# Altium PCB fhd-hdr.PcbDoc
Units mil, origin at the board's own origin, x right, y up, seen from the top; angles counter-clockwise.
Board outline 1400 x 650 mil, 6 copper layers (Top, 2-GND, 3-SIG, 4-SIG, 5-GND, Bottom), stack 46.142 mil thick; 75 components, 43 nets, 307 pads, 160 vias.
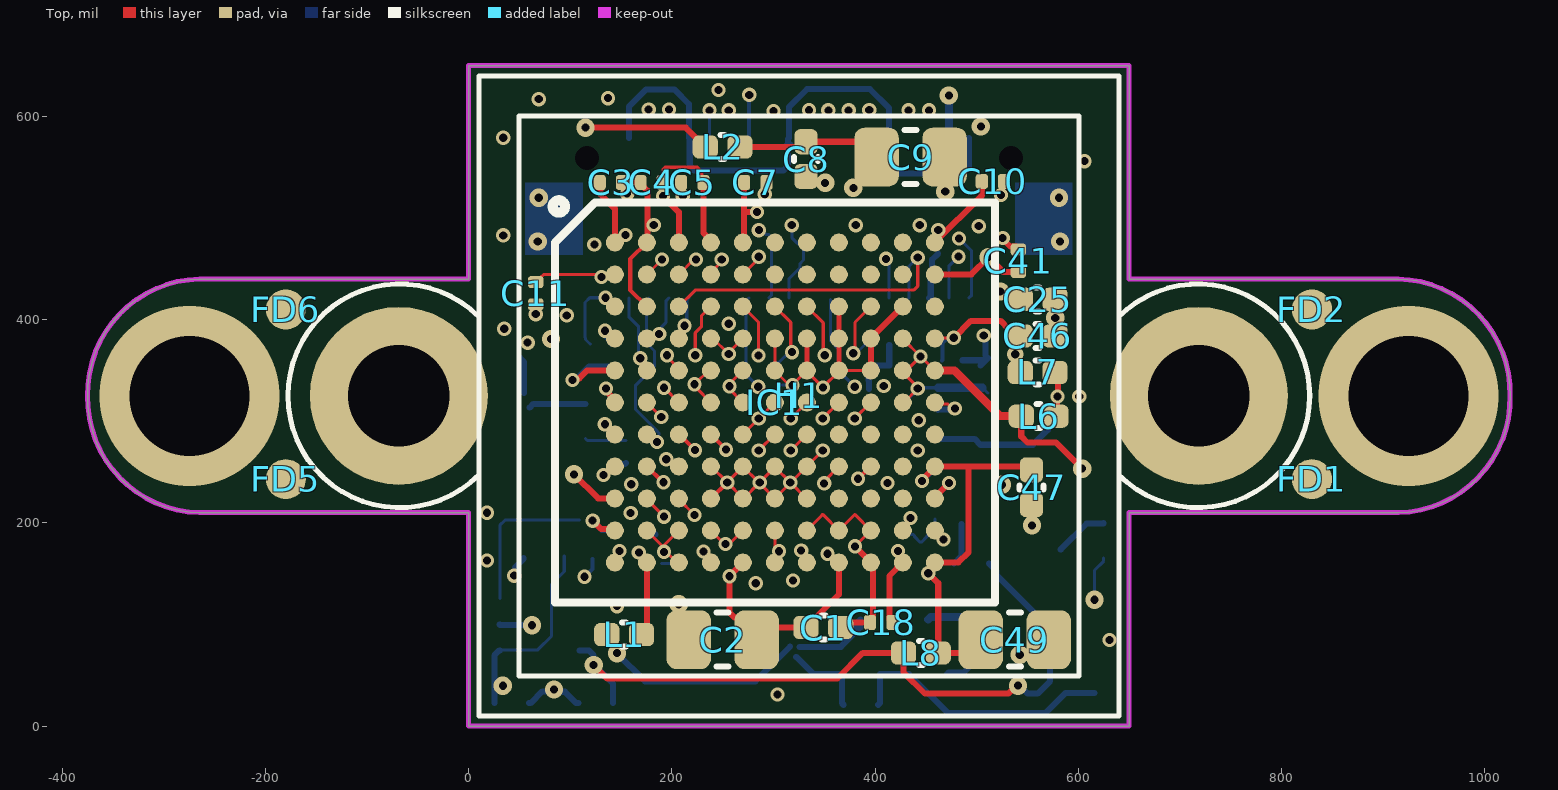
[diagram p0: Top view]
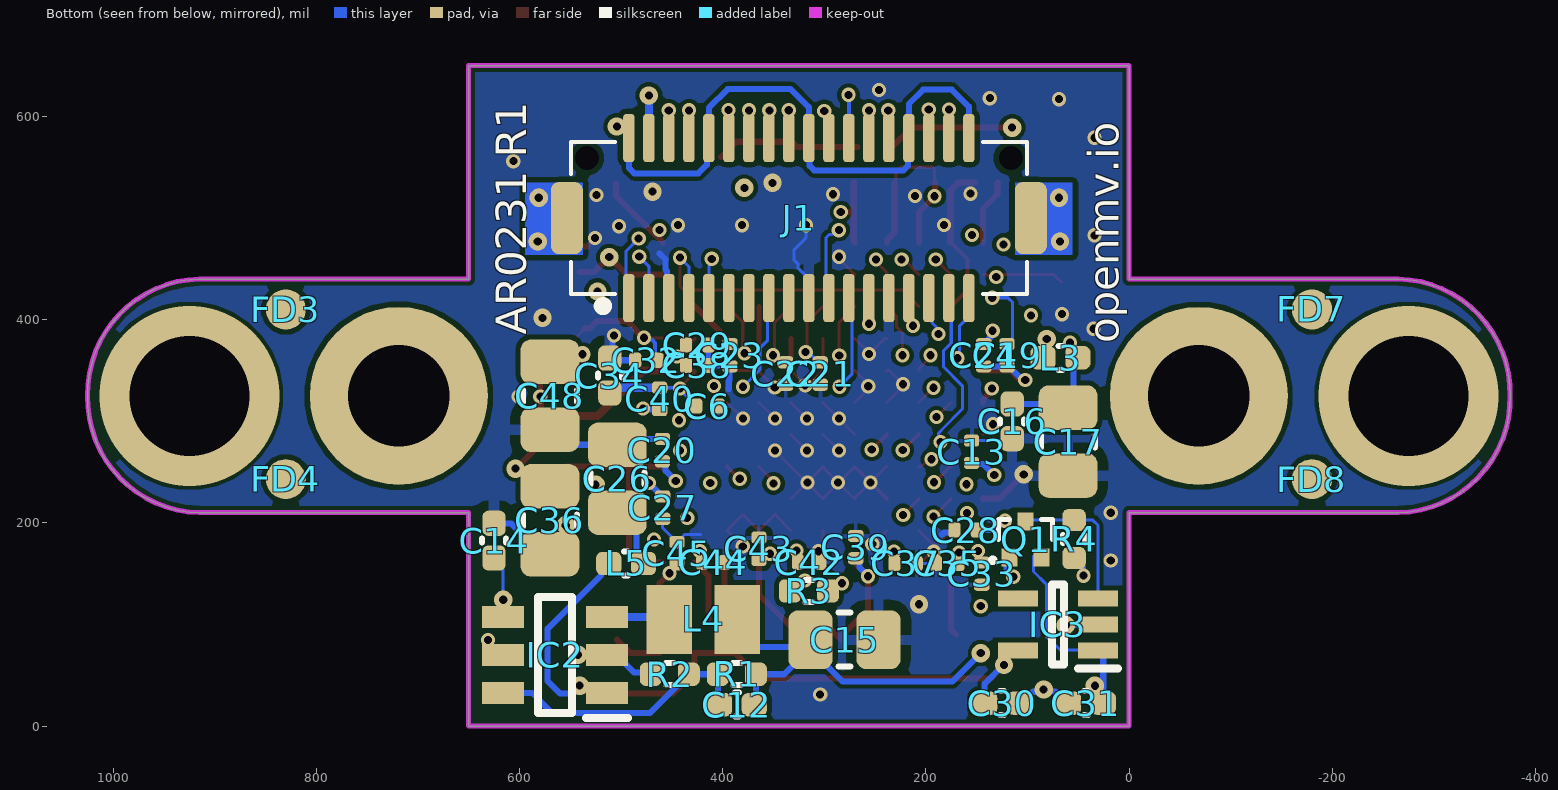
[diagram p1: Bottom view, seen from below]
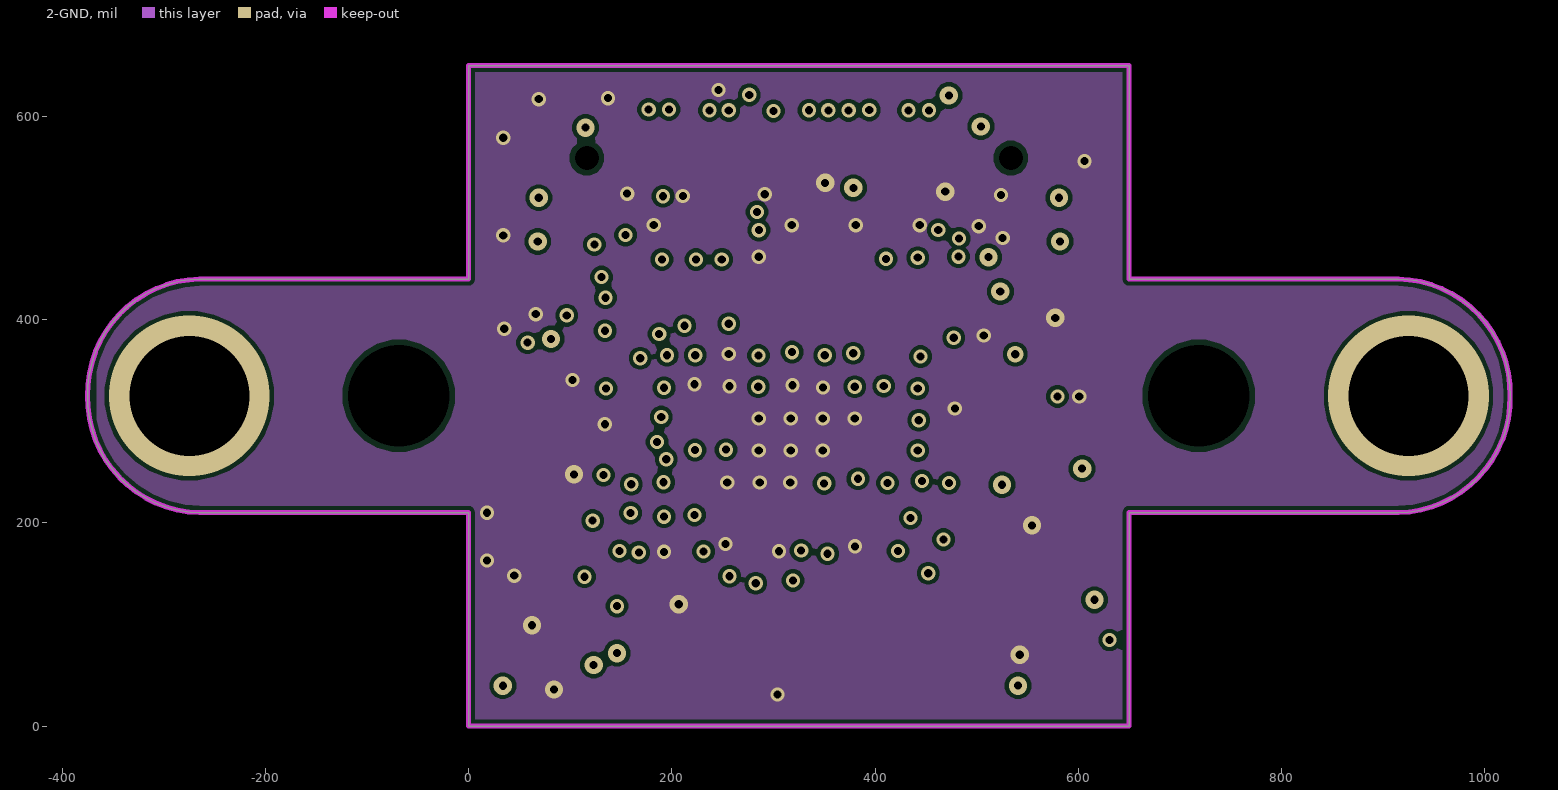
[diagram p2: 2-GND]
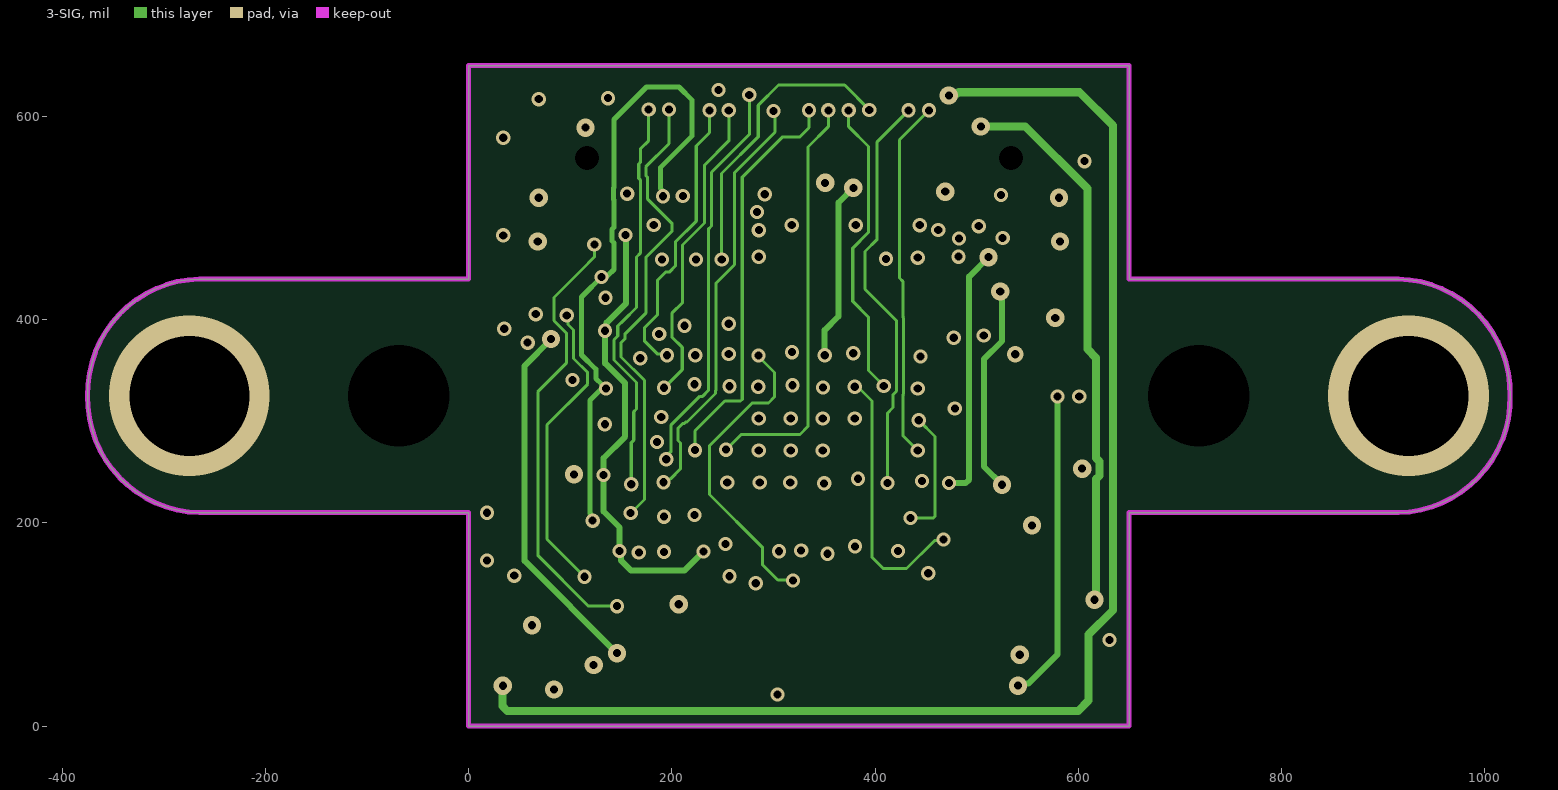
[diagram p3: 3-SIG]
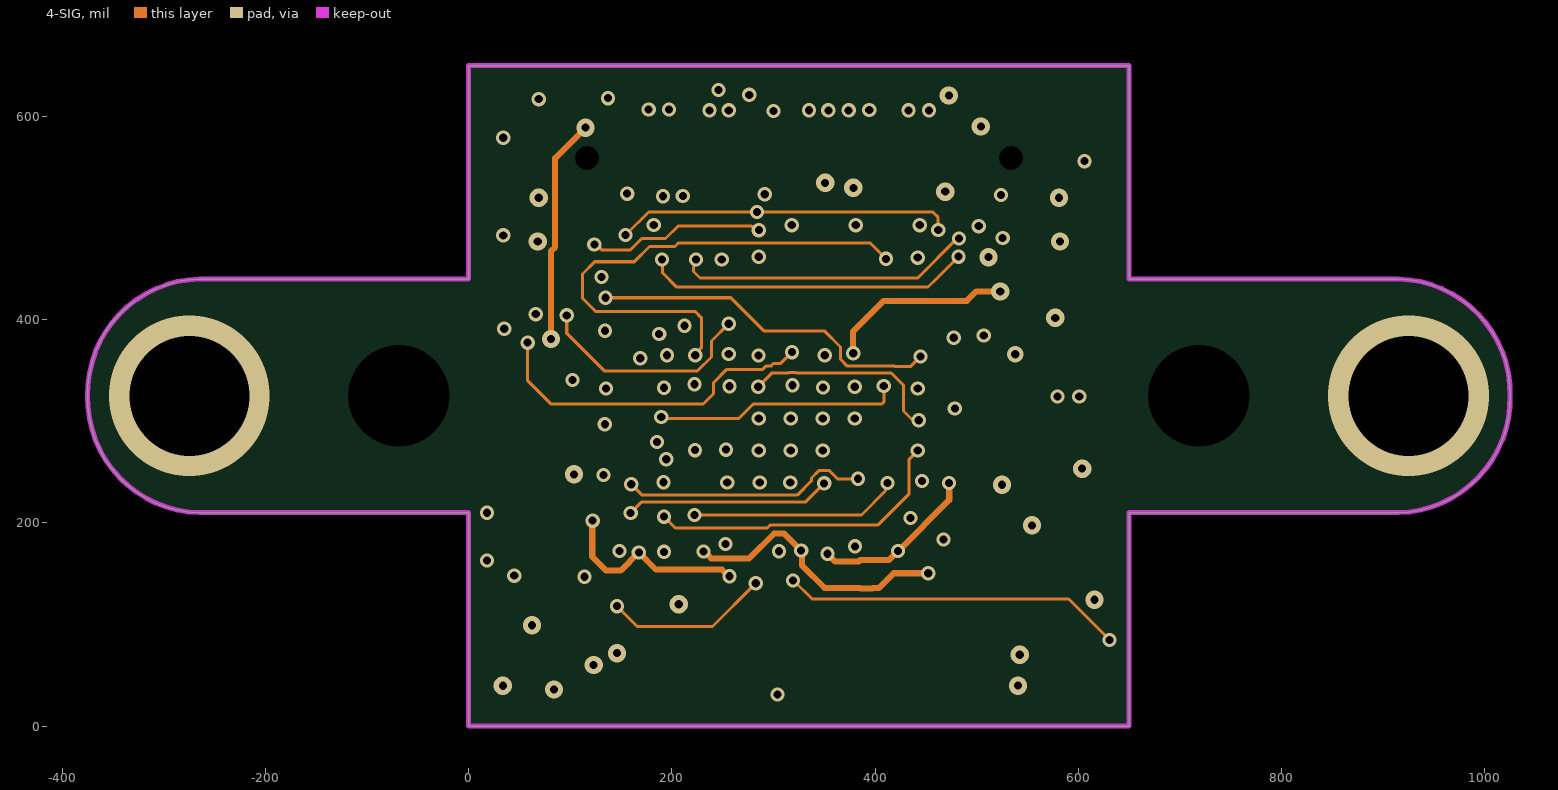
[diagram p4: 4-SIG]
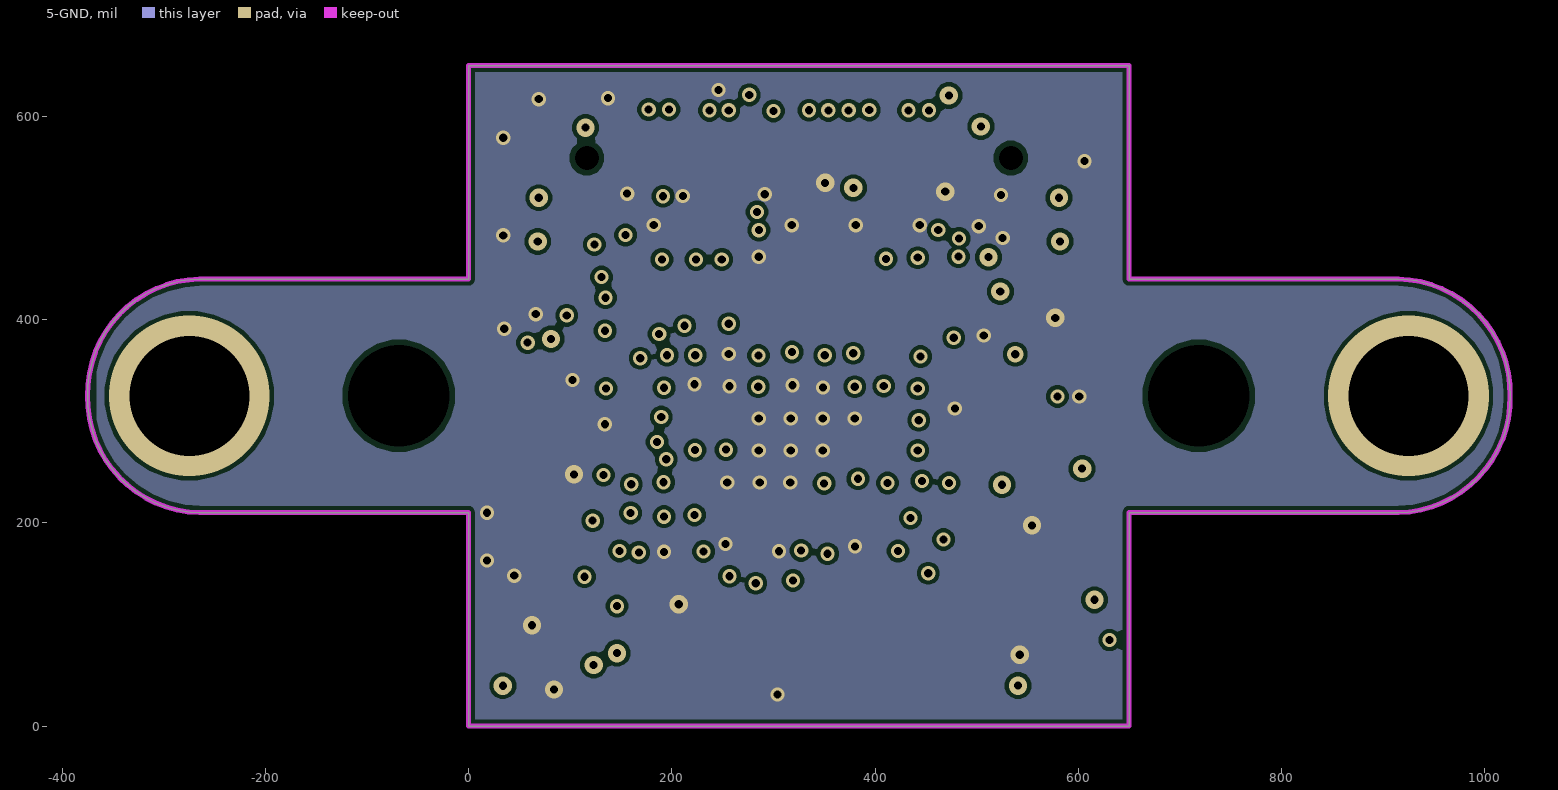
[diagram p5: 5-GND]
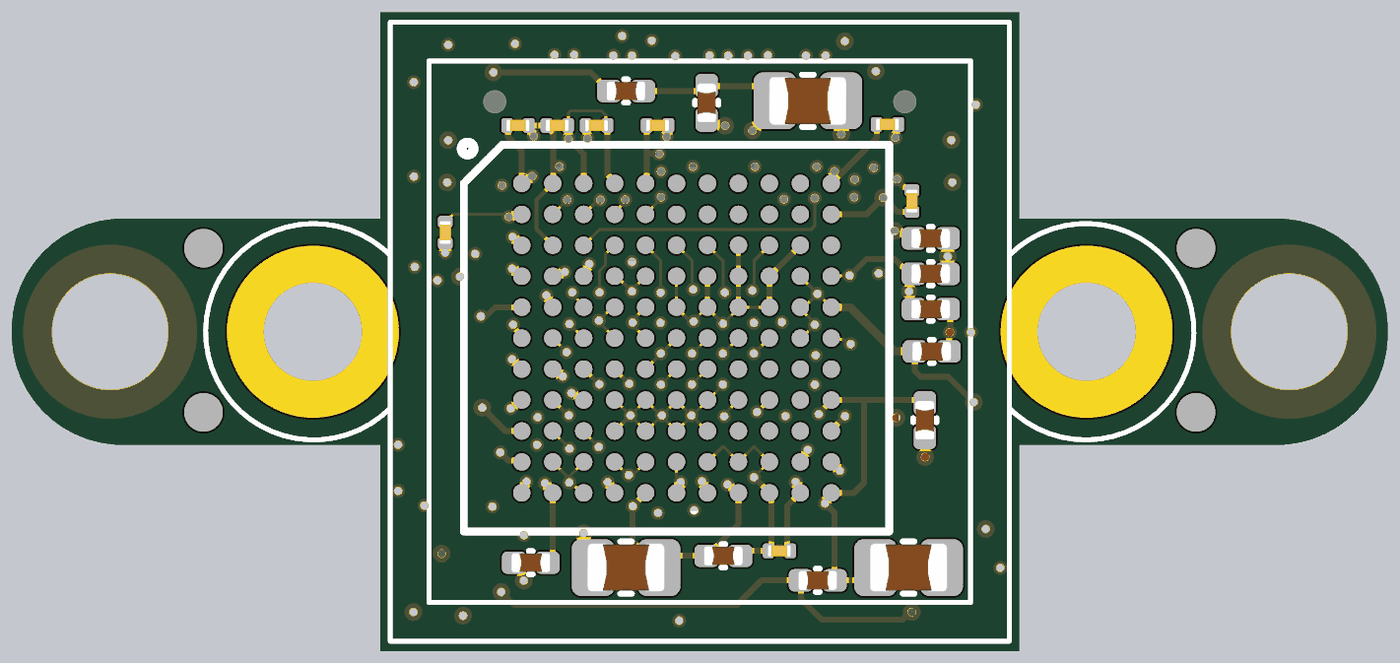
[diagram p6: 3D render of the assembled board from above, using the file's embedded part models]
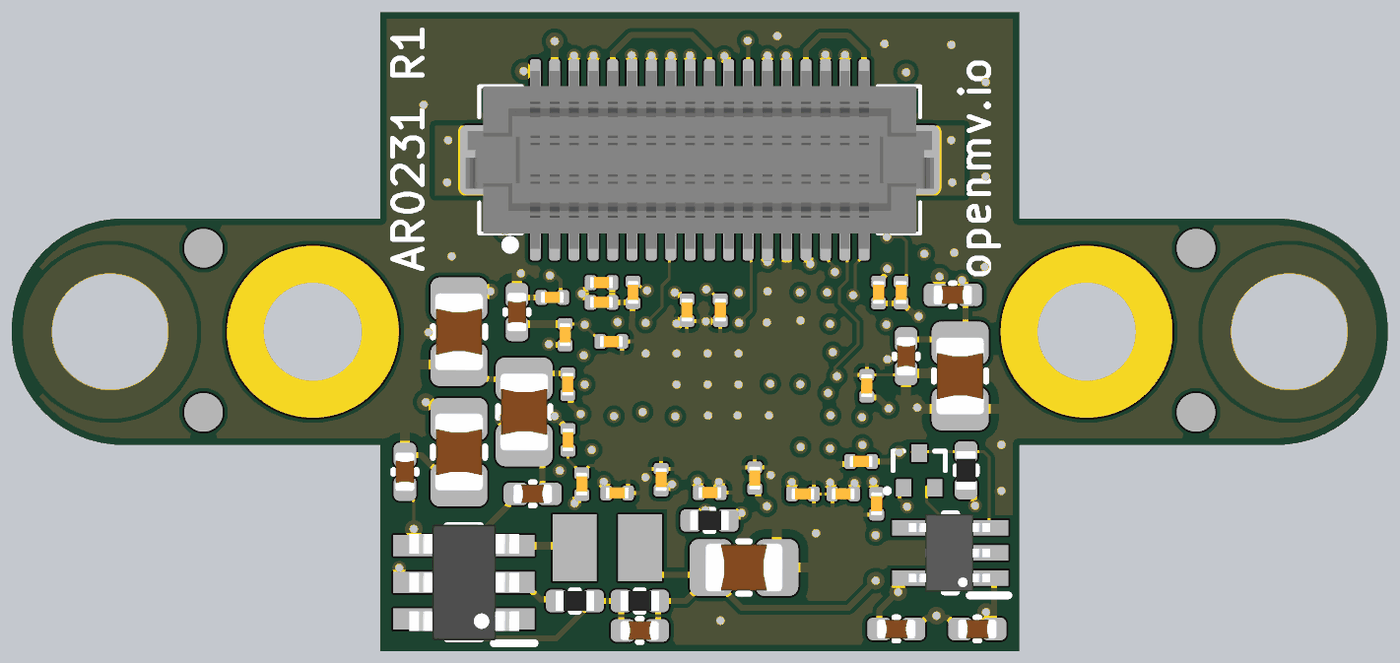
[diagram p7: 3D render of the assembled board from below, using the file's embedded part models]

## Layer stack, top to bottom
Top Solder: solder mask 0.4, Solder Resist, Dk 3.5
Top: signal copper 1.378
Dielectric 2: prepreg 5, PP-006, Dk 4.1
2-GND: signal copper 1.378
Dielectric 3: prepreg 10, PP-006, Dk 4.1
3-SIG: signal copper 1.378
Dielectric 1: dielectric 7.874, FR-4, Dk 4.8
4-SIG: signal copper 1.378
Dielectric 4: prepreg 10, PP-006, Dk 4.1
5-GND: signal copper 1.378
Dielectric 9: prepreg 5, PP-006, Dk 4.1
Bottom: signal copper 1.378
Bottom Solder: solder mask 0.4, Solder Resist, Dk 3.5

## Board outline
914.97,210 649.97,210 649.97,0 -0.03,0 -0.03,210 -265.03,210 cw(c-262.53,322.5) -375.03,325 cw(c-262.53,327.5) -265.03,440 -0.03,440 -0.03,650 649.97,650 649.97,440 914.97,440 cw(c912.47,327.5) 1024.97,325 cw(c912.47,322.5)

## Design rules (kind name [scope] priority, off if disabled: settings)
BoardOutlineClearance mdCopperDimension [All] p1: gap=10 ignorepadtopadclearanceinfootprint=FALSE except(0: Arc-SplitContinuation Track-SplitContinuation SMDPad-SplitContinuation THPad-SplitContinuation Via-SplitContinuation Fill-SplitContinuation Poly-SplitContinuation Region-SplitContinuation Text-SplitContinuation; 3: Poly-OutlineEdge Poly-CavityEdge Poly-CutoutEdge Poly-SplitBarrior)
Clearance [All] p1: gap=4 ignorepadtopadclearanceinfootprint=FALSE except(5: SMDPad-Fill SMDPad-Poly SMDPad-Region THPad-Fill THPad-Poly THPad-Region Fill-Fill Fill-Poly Fill-Region Poly-Poly Poly-Region Region-Region)
ComponentClearance ComponentClearance_1 [InComponent('H1')] p1: gap=0 collisioncheckmode=3 verticalgap=0 showdistances=FALSE
ComponentClearance [not InComponent('H1')] p2: gap=6 collisioncheckmode=3 verticalgap=0 showdistances=FALSE
HoleSize HoleSize_For_NetClass_signal [InNetClass('signal')] p1: absolutevalues=TRUE maxlimit=4 minlimit=4 maxpercent=80.000 minpercent=20.000
HoleSize HoleSize_For_NetClass_pwr [InNetClass('pwr')] p2: absolutevalues=TRUE maxlimit=4 minlimit=4 maxpercent=80.000 minpercent=20.000
HoleSize HoleSize_For_NetClass_gnd [InNetClass('gnd')] p3: absolutevalues=TRUE maxlimit=4 minlimit=4 maxpercent=80.000 minpercent=20.000
HoleSize [All] p4: absolutevalues=TRUE maxlimit=100000 minlimit=4 maxpercent=80.000 minpercent=20.000
HoleToHoleClearance mdDrill [All] p1: gap=3 allowstackedmicrovias=TRUE
MinimumSolderMaskSliver [All] p1 off: minsoldermaskwidth=10
PasteMaskExpansion Expansion_SMDPaste_OFF [InPadClass('SMDPaste_OFF')] p1: expansion=0
PasteMaskExpansion mlMinCreamFrame [All] p2: expansion=0
PolygonConnect 0201 [HasFootprint('C0201')] p1: thpad.connectstyle=Relief thpad.reliefconductorwidth=10 thpad.reliefentries=4 thpad.polygonreliefangle="90 Angle" thpad.airgapwidth=10 smdpad.connectstyle=Relief smdpad.reliefconductorwidth=4 smdpad.reliefentries=4 smdpad.polygonreliefangle="90 Angle" smdpad.airgapwidth=6 via.connectstyle=Direct via.reliefconductorwidth=10 via.reliefentries=4 via.polygonreliefangle="90 Angle" via.airgapwidth=10
PolygonConnect PolygonConnect_1 [All] p2: thpad.connectstyle=Relief thpad.reliefconductorwidth=10 thpad.reliefentries=4 thpad.polygonreliefangle="90 Angle" thpad.airgapwidth=10 smdpad.connectstyle=Relief smdpad.reliefconductorwidth=10 smdpad.reliefentries=4 smdpad.polygonreliefangle="90 Angle" smdpad.airgapwidth=10 via.connectstyle=Direct via.reliefconductorwidth=10 via.reliefentries=4 via.polygonreliefangle="90 Angle" via.airgapwidth=10
RoutingVias [All] p1: holewidth=8 width=14 viastyle="Through Hole" minholewidth=8 minwidth=14 maxholewidth=100 maxwidth=100
SolderMaskExpansion mlMinStopFrame [All] p1: expansion=2 istentingtop=FALSE
Width Width_For_NetClass_signal [InNetClass('signal')] p1: maxlimit=10 minlimit=3 preferedwidth=3
Width Width_For_NetClass_pwr [InNetClass('pwr')] p2: maxlimit=10 minlimit=3 preferedwidth=3
Width Width_For_NetClass_gnd [InNetClass('gnd')] p3: maxlimit=10 minlimit=3 preferedwidth=3
Width [All] p4: maxlimit=10 minlimit=3 preferedwidth=3
25 further rules are at their usual default settings.

## Classes and differential pairs
pad class SMDPaste_OFF: FD1-1 FD2-1 FD3-1 FD4-1 FD5-1 FD6-1 FD7-1 FD8-1

## Components (designator, comment, footprint, x,y, rotation, side; value= is the part's Value field where it differs from the comment)
C1 "4.7uF" 0402 349,97 r180 top
C2 "22uF" 0805 249.97,85 r0 top
C3 "0.22uF" C0201 140,535 r0 top
C4 "0.22uF" C0201 179.97,535 r180 top
C5 "0.22uF" C0201 219.97,535 r180 top
C6 "0.22uF" C0201 414.97,315 r0 bottom
C7 "0.22uF" C0201 282,535 r0 top
C8 "4.7uF" 0402 332,558 r90 top
C9 "22uF" 0805 434.97,560 r180 top
C10 "0.22uF" C0201 516,536 r0 top
C11 "0.22uF" C0201 66,426 r270 top
C12 "6.8pF" 0402 386,21 r0 bottom
C13 "0.22uF" C0201 154.97,270 r270 bottom
C14 "4.7uF" 0402 624.97,182.5 r270 bottom
C15 "22uF" 0805 280,85 r0 bottom
C16 "4.7uF" 0402 114.97,300 r90 bottom
C17 "22uF" 0805 59.97,280 r90 bottom
C18 "0.22uF" C0201 406,102 r180 top
C19 "0.22uF" C0201 120,365 r270 bottom
C20 "0.22uF" C0201 459.3,271.61 r270 bottom
C21 "0.22uF" C0201 304,347 r270 bottom
C22 "0.22uF" C0201 338,347 r270 bottom
C23 "0.22uF" C0201 392.86,365.02 r270 bottom
C24 "0.22uF" C0201 143,365 r270 bottom
C25 "4.7uF" 0402 560,420 r180 top
C26 "22uF" 0805 503.64,243.41 r270 bottom
C27 "0.22uF" C0201 459,215 r90 bottom
C28 "0.22uF" C0201 160.79,192.96 r180 bottom
C29 "0.22uF" C0201 424.97,375 r180 bottom
C30 "4.7uF" 0402 124.97,22.5 r0 bottom
C31 "4.7uF" 0402 42.47,22.5 r180 bottom
C32 "0.22uF" C0201 475,360 r0 bottom
C33 "0.22uF" C0201 144.97,150 r90 bottom
C34 "4.7uF" 0402 511,345 r270 bottom
C35 "0.22uF" C0201 179,160 r180 bottom
C36 "22uF" 0805 569.97,202.5 r90 bottom
C37 "0.22uF" C0201 219.97,160 r0 bottom
C38 "0.22uF" C0201 424.97,355 r180 bottom
C39 "0.22uF" C0201 268.98,176.09 r270 bottom
C40 "0.22uF" C0201 462,322 r270 bottom
C41 "0.22uF" C0201 541,458 r90 top
C42 "0.22uF" C0201 314.79,161.33 r0 bottom
C43 "0.22uF" C0201 364.27,174.52 r270 bottom
C44 "0.22uF" C0201 409,161 r0 bottom
C45 "0.22uF" C0201 444.97,170 r270 bottom
C46 "4.7uF" 0402 560,384 r180 top
C47 "4.7uF" 0402 554,235 r90 top
C48 "22uF" 0805 569.97,325 r90 bottom
C49 "22uF" 0805 537.47,85 r180 top
FD1 "FIDUCIAL1X2" FIDUCIAL-1X2 829.97,243 r0 top
FD2 "FIDUCIAL1X2" FIDUCIAL-1X2 829.97,410 r0 top
FD3 "FIDUCIAL1X2" FIDUCIAL-1X2 829.97,410 r180 bottom
FD4 "FIDUCIAL1X2" FIDUCIAL-1X2 829.97,243 r180 bottom
FD5 "FIDUCIAL1X2" FIDUCIAL-1X2 -180.03,243 r0 top
FD6 "FIDUCIAL1X2" FIDUCIAL-1X2 -180.03,410 r0 top
FD7 "FIDUCIAL1X2" FIDUCIAL-1X2 -180.03,410 r180 bottom
FD8 "FIDUCIAL1X2" FIDUCIAL-1X2 -180.03,243 r180 bottom
H1 "LENSMOUNT20MM" LENSMOUNT-20MM 324.97,325 r0 top locked
IC1 "AR0231AT7C00XUEA0-DRBR-E" BGA121C80P11X11_1100X1000X155 301.35,318.5 r0 top locked
IC2 "TLV62568PDDCR" SOT95P280X110-6N 564.97,70 r0 bottom
IC3 "MIC5365-2.8YC5-TR" SOT65P210X110-5N 69.97,100 r0 bottom
J1 "DF12-36-DP" DF12-36-DP 325,500 r0 bottom
L1 "100" 0402 153,90 r180 top
L2 "100" 0402 249.97,570 r180 top
L3 "100" 0402 67.47,362.5 r0 bottom
L4 "MAKK2016T2R2M" INDC2016X100N 419,105 r0 bottom
L5 "100" 0402 494.97,160 r0 bottom
L6 "100" 0402 561,305 r0 top
L7 "100" 0402 560,348 r0 top
L8 "100" 0402 445,72 r180 top
Q1 "SSM3J15FV,L3F" SSM3J15FV 101.71,183.79 r180 bottom
R1 "100K" R0402 386,51 r180 bottom
R2 "100K" R0402 452,51 r0 bottom
R3 "10K" R0402 315,133 r180 bottom
R4 "100K" R0402 54,184 r270 bottom

## Footprints (in the part's own frame and the unit in brackets; to place one, negate y for a bottom-side part, rotate by r counter-clockwise, add the part's x,y. Pads: shape width x height; smd on the part's side, far side on the other; paste and mask are expansions set on the pad)
0402 [mm] "Chip Capacitor, 2-Leads, Body  0402 (in) 1005 (mm), IPC Medium Density"
  rrect52% 0.63x0.58 smd mask+0.05: 1(-0.435,0) 2(0.435,0)
  silkscreen extent -0.05,-0.3 0.05,0.3, body extent -0.5,-0.25 0.5,0.25, height 0.5
0805 [mm] "Chip Capacitor, Body 0805 imperial, 2.0x1.2mm, IPC Medium Density"
  rrect45% 1.11x1.47 smd: 1(-0.85,0) 2(0.85,0)
  silkscreen extent -0.15,-0.67 0.15,0.67, body extent -1,-0.62 1,0.63, height 1.25
BGA121C80P11X11_1100X1000X155 [mil] "BGA121C80P11X11_1100X1000X155"
  rrect100% 17.72x17.72 smd: A1(-157.48,157.48) A2(-125.98,157.48) A3(-94.49,157.48) A4(-62.99,157.48) A5(-31.5,157.48) A6(0,157.48) A7(31.5,157.48) A8(62.99,157.48) A9(94.49,157.48) A10(125.98,157.48) A11(157.48,157.48) B1(-157.48,125.98) B2(-125.98,125.98) B3(-94.49,125.98) B4(-62.99,125.98) B5(-31.5,125.98) B6(0,125.98) B7(31.5,125.98) B8(62.99,125.98) B9(94.49,125.98) B10(125.98,125.98) B11(157.48,125.98) C1(-157.48,94.49) C2(-125.98,94.49) C3(-94.49,94.49) C4(-62.99,94.49) C5(-31.5,94.49) C6(0,94.49) C7(31.5,94.49) C8(62.99,94.49) C9(94.49,94.49) C10(125.98,94.49) C11(157.48,94.49) D1(-157.48,62.99) D2(-125.98,62.99) D3(-94.49,62.99) D4(-62.99,62.99) D5(-31.5,62.99) D6(0,62.99) D7(31.5,62.99) D8(62.99,62.99) D9(94.49,62.99) D10(125.98,62.99) D11(157.48,62.99) E1(-157.48,31.5) E2(-125.98,31.5) E3(-94.49,31.5) E4(-62.99,31.5) E5(-31.5,31.5) E6(0,31.5) E7(31.5,31.5) E8(62.99,31.5) E9(94.49,31.5) E10(125.98,31.5) E11(157.48,31.5) F1(-157.48,0) F2(-125.98,0) F3(-94.49,0) F4(-62.99,0) F5(-31.5,0) F6(0,0) F7(31.5,0) F8(62.99,0) F9(94.49,0) F10(125.98,0) F11(157.48,0) G1(-157.48,-31.5) G2(-125.98,-31.5) G3(-94.49,-31.5) G4(-62.99,-31.5) G5(-31.5,-31.5) G6(0,-31.5) G7(31.5,-31.5) G8(62.99,-31.5) G9(94.49,-31.5) G10(125.98,-31.5) G11(157.48,-31.5) H1(-157.48,-62.99) H2(-125.98,-62.99) H3(-94.49,-62.99) H4(-62.99,-62.99) H5(-31.5,-62.99) H6(0,-62.99) H7(31.5,-62.99) H8(62.99,-62.99) H9(94.49,-62.99) H10(125.98,-62.99) H11(157.48,-62.99) J1(-157.48,-94.49) J2(-125.98,-94.49) J3(-94.49,-94.49) J4(-62.99,-94.49) J5(-31.5,-94.49) J6(0,-94.49) J7(31.5,-94.49) J8(62.99,-94.49) J9(94.49,-94.49) J10(125.98,-94.49) J11(157.48,-94.49) K1(-157.48,-125.98) K2(-125.98,-125.98) K3(-94.49,-125.98) K4(-62.99,-125.98) K5(-31.5,-125.98) K6(0,-125.98) K7(31.5,-125.98) K8(62.99,-125.98) K9(94.49,-125.98) K10(125.98,-125.98) K11(157.48,-125.98) L1(-157.48,-157.48) L2(-125.98,-157.48) L3(-94.49,-157.48) L4(-62.99,-157.48) L5(-31.5,-157.48) L6(0,-157.48) L7(31.5,-157.48) L8(62.99,-157.48) L9(94.49,-157.48) L10(125.98,-157.48) L11(157.48,-157.48)
  silkscreen extent -219,-197 217,199, body extent -217,-197 217,197, height 39
C0201 [mil] "0201 IPC-7351"
  rrect50% 12x15 smd mask+1.97: 1(-11,0) 2(11,0)
  body extent -12,-6 12,6, height 14
DF12-36-DP [mm] "36 Position Connector Receptacle, Center Strip Contacts Surface Mount Gold"
  rrect50% 0.8x1.8 smd mask+0.05: 0(-5.8,0) 0(5.8,0)
  rrect50% 0.28x1.2 smd mask+0.05: 1(4.25,2) 2(4.25,-2) 3(3.75,2) 4(3.75,-2) 5(3.25,2) 6(3.25,-2) 7(2.75,2) 8(2.75,-2) 9(2.25,2) 10(2.25,-2) 11(1.75,2) 12(1.75,-2) 13(1.25,2) 14(1.25,-2) 15(0.75,2) 16(0.75,-2) 17(0.25,2) 18(0.25,-2) 19(-0.25,2) 20(-0.25,-2) 21(-0.75,2) 22(-0.75,-2) 23(-1.25,2) 24(-1.25,-2) 25(-1.75,2) 26(-1.75,-2) 27(-2.25,2) 28(-2.25,-2) 29(-2.75,2) 30(-2.75,-2) 31(-3.25,2) 32(-3.25,-2) 33(-3.75,2) 34(-3.75,-2) 35(-4.25,2) 36(-4.25,-2)
  round 0 hole 0.6 unplated: MH1(-5.3,-1.5) MH2(5.3,-1.5)
  silkscreen extent -5.7,-1.9 5.7,2.3, body extent -6.05,-2.3 6.05,2.3, height 2.3
FIDUCIAL-1X2 [mm] "FIDUCIAL-1X2"
  rrect100% 1x1 smd paste+0: 1(0,0)
INDC2016X100N [mm] "INDC2016X100N"
  rect 1.14x1.73 smd: 1(-0.847,0) 2(0.847,0)
  body extent -1,-0.8 1,0.8, height 1
LENSMOUNT-20MM [mil] "LENSMOUNT-20MM"
  round 175 / inner round 0 / far side round 175 hole 100: P$1(-393.7,0) P$2(393.7,0)
  silkscreen extent -503,-315 503,315
R0402 [mm] "Chip Resistor, 2-Leads, Body  0402 (in) 1005 (mm), IPC Medium Density"
  rrect51% 0.55x0.58 smd mask+0.05: 1(-0.475,0) 2(0.475,0)
  silkscreen extent -0.1,-0.28 0.1,0.28, body extent -0.5,-0.25 0.5,0.25, height 0.34
SOT65P210X110-5N [mm] "SOT65P210X110-5N"
  rect 1x0.4 smd: 1(-1,0.65) 2(-1,0) 3(-1,-0.65) 4(1,-0.65) 5(1,0.65)
  silkscreen extent -1.5,-1 0.15,1.1, body extent -1.02,-1 1.07,1, height 0.96
SOT95P280X110-6N [mil] "SOT95P280X100-6N"
  rect 41.34x21.65 smd: 1(-51.18,37.4) 2(-51.18,0) 3(-51.18,-37.4) 4(51.18,-37.4) 5(51.18,0) 6(51.18,37.4)
  silkscreen extent -72,-57 17,62, body extent -56,-59 56,59, height 44
SSM3J15FV [mm]
  rect 0.4x0.45 smd: 1(-0.4,-0.45) 2(0.4,-0.45) 3(0,0.45)
  silkscreen extent -0.88,-0.58 0.67,0.5, body extent -0.6,-0.6 0.6,0.6, height 0.6

## Part data
C1 C8 C14 C16 C25 C30 C31 C34 C46 C47: library part CAP_0402, "0402 (1005 Metric) Nick Garner - TeleSense", MPN=JMK105BBJ475MV-F, DeviceSetName=CAP_0402, GateName_1=G$1, LibraryName=0402, SymbolName_1=CAP
C2 C9 C15 C17 C26 C36 C48 C49: library part 22UF-0805-6.3V-20%, "22ÂµF ceramic capacitors    A capacitor is a passive two-terminal electrical component used to store electrical energy temporarily in an electric field.", MPN=CL21A226MQQNNNE, DeviceName=-0805-6.3V-20%, DeviceSetName=22UF, GateName_1=G$1, LibraryName=SparkFun-Capacitors, PROD_ID=CAP-08402, SymbolName_1=CAP
C3 C4 C5 C6 C7 C10 C11 C13 C18 C19 C20 C21 C22 C23 C24 C27 C28 C29 C32 C33 C35 C37 C38 C39 C40 C41 C42 C43 C44 C45: library part C-EUC0201, "CAPACITOR, European symbol", MPN=GRM033R60J224ME15D, DeviceName=C0201, DeviceSetName=C-EU, GateName_1=G$1, LibraryName=rcl, POPULARITY=0, SPICEPREFIX=C, SymbolName_1=C-EU
C12: library part CAP_0402, "0402 (1005 Metric) Nick Garner - TeleSense", MPN=GRM1555C1H6R8DA01D, DeviceSetName=CAP_0402, GateName_1=G$1, LibraryName=0402, SymbolName_1=CAP
FD1 FD2 FD3 FD4 FD5 FD6 FD7 FD8: "Fiducial Alignment Points    Point-of-reference for pick-and-place machines and other optical instruments.", DeviceName=1X2, DeviceSetName=FIDUCIAL, GateName_1=G$1, LibraryName=SparkFun-Aesthetics, SymbolName_1=FIDUCIAL
IC1: "Image Sensor Color CMOS 1928 x 1208Pixels   Source:  Datasheet", MANUFACTURER_NAME=onsemi, MPN=AR0231AT7C00XUEA0-DPBR, ARROW_PART_NUMBER=ARROW_PART_NUMBER, ARROW_PRICE-STOCK=ARROW_PRICE-STOCK, DeviceSetName=AR0231AT7C00XUEA0-DRBR-E, GateName_1=G$1, HEIGHT=1.55mm, LibraryName=AR0231AT7C00XUEA0-DRBR-E, MANUFACTURER_PART_NUMBER=AR0231AT7C00XUEA0-DRBR-E, MOUSER_PART_NUMBER=MOUSER_PART_NUMBER, MOUSER_PRICE-STOCK=MOUSER_PRICE-STOCK, SymbolName_1=AR0231AT7C00XUEA0-DRBR-E
IC2: "2.5V-5.5V input, 1A high efficiency step-down buck converter in SOT23 and SOT563 package   Source:  Datasheet", MANUFACTURER_NAME="Texas Instruments", DeviceSetName=TLV62568PDDCR, GateName_1=G$1, HEIGHT=1.1mm, LibraryName=TLV62568PDDCR, MANUFACTURER_PART_NUMBER=TLV62568PDDCR, MOUSER_PART_NUMBER=595-TLV62568PDDCR, MOUSER_PRICE-STOCK=https://www.mouser.co.uk/ProductDetail/Texas-Instruments/TLV62568PDDCR?qs=1mbolxNpo8f1FPchIXcxyQ%3D%3D, MPN=TLV62568PDDCR, SymbolName_1=TLV62568PDDCR
IC3: "IC REG LINEAR 2.8V 150MA SC70-5   Source:  Datasheet", MANUFACTURER_NAME=Microchip, DeviceSetName=MIC5365-2.8YC5-TR, GateName_1=G$1, HEIGHT=1.1mm, LibraryName=MIC5365-2.8YC5-TR, MANUFACTURER_PART_NUMBER=MIC5365-2.8YC5-TR, MOUSER_PART_NUMBER=998-MIC5365-2.8YC5TR, MOUSER_PRICE-STOCK=https://www.mouser.co.uk/ProductDetail/Microchip-Technology-Atmel/MIC5365-2.8YC5-TR?qs=U6T8BxXiZAX3mJDSWJyjVA%3D%3D, MPN=MIC5365-2.8YC5-TR, SymbolName_1=MIC5365-2.8YC5-TR
J1: MPN=DF12NB(3.0)-36DP-0.5V(51), DeviceSetName=DF12-36-DP, GateName_1=G$1, LibraryName=DF12NB(3.0)-36DP-0.5V(51), SymbolName_1=DF12-36
L1 L2 L3 L5 L6 L7 L8: library part INDUCTOR_0402, MPN=MFBM1V1005-101-R, DeviceSetName=INDUCTOR_0402, GateName_1=G$1, LibraryName=0402, SymbolName_1=INDUCTOR
L4: "INDUCTOR, METAL CORE Check availability", PACKAGE="2016 Taiyo Yuden", AVAILABILITY="In Stock", DeviceSetName=MAKK2016T2R2M, GateName_1=G$1, LibraryName=MAKK2016T2R2M, MF="Taiyo Yuden", MP=MAKK2016T2R2M, MPN=MAKK2016T2R2M, PRICE=None, PURCHASE-URL=https://pricing.snapeda.com/search/part/MAKK2016T2R2M/?ref=eda, SymbolName_1=MAKK2016T2R2M
Q1: library part PMXB120EPEZ, "MOSFET 30 V, P-channel Trench MOSFET   Source:  Datasheet", DeviceSetName=SSM3J15FV,L3F, GateName_1=G$1, HEIGHT=0.4mm, LibraryName=SSM3J15FV,L3F, MANUFACTURER_PART_NUMBER=SSM3J15FV,L3F, MPN=SSM3J15FV,L3F, SymbolName_1=SSM3J15FV,L3F
R1 R2 R4: library part R-US_R0402, "RESISTOR, American symbol", MPN=AC0402FR-07100KL, DeviceName=R0402, DeviceSetName=R-US_, GateName_1=G$1, LibraryName=rcl, POPULARITY=34, SPICEPREFIX=R, SymbolName_1=R-US
R3: library part R-US_R0402, "RESISTOR, American symbol", MPN=AC0402FR-1310KL, DeviceName=R0402, DeviceSetName=R-US_, GateName_1=G$1, LibraryName=rcl, POPULARITY=34, SPICEPREFIX=R, SymbolName_1=R-US
H1: DeviceName=20MM, DeviceSetName=LENSMOUNT, GateName_1=G$1, LibraryName=lensmount, SymbolName_1=LENS

## Via types
v1: diameter 14, hole 8, Top to Bottom, tented both sides, 130 vias
v2: diameter 18, hole 8, Top to Bottom, tented both sides, 27 vias
v3: diameter 177.17/158.11/158.11/158.11/158.11/177.17 (per signal layer), hole 118.11, Top to Bottom, 2 vias
v4: diameter 16, hole 8, Top to Bottom, tented both sides, 1 vias

## Nets (pads, with @x,y where several pads share a name; then routed paths per layer and width w, separated by ;. In a path a pad name is that pad's centre, name@x,y a point inside that pad or via, vN(x,y) a via of type N, cw(c..) or ccw(c..) an arc to the next point about the centre after c; other vN are vias at no path point)
DCMI_CLK: IC1.B4 J1.12 | length 314
  Top w3: IC1.B4 238.36,446.51 249.11,457.26 v1(249.11,459.28)
  3-SIG w3: v1(249.11,459.28) 248.85,459.54 248.85,543.87 285,580.01 285,611 305,631 370,631 394.31,606.69 v1(394.31,606.41)
DCMI_D0: IC1.B2 J1.3 | length 388.5
  Top w3: IC1.B2 175.46,444.48 v1(190.23,459.26)
  4-SIG w3: v1(190.23,459.26) 190.95,458.54 190.95,445.9 204.84,432 409.64,432 409.7,432.06 452.06,432.06 460.36,440.36 v1(482,462)
  Bottom w3: J1.3 472.64,452.64 v1(482,462)
DCMI_D1: IC1.B3 J1.1 | length 380.9
  Top w3: IC1.B3@206.9,444.48 221.54,459.11 v1(223.78,459.11)
  4-SIG w3: v1(223.78,459.11) 221.67,457.01 221.67,452.27 221.26,451.86 221.26,447.36 227.62,441 442,441 480.99,479.99 v1(482.64,479.99)
  Bottom w3: v1(482.64,479.99) 495,467.62 495,423.94 J1.1
DCMI_D2: IC1.C4 J1.9 | length 603.3
  Top w3: v1(223,365) 223,387 229,393 229,403.63 IC1.C4
  4-SIG w3: v1(223,365) 223,366.26 229,372.26 229,402 223,408 125,408 112,421 112,445 124,457 163,457 178,472 203,472 206.58,475.58 394.97,475.58 v1(410.68,459.86) v1@410.68,462.84
  Bottom w3: v1(410.68,459.86) 410.68,456.89 413.58,453.98 J1.9
DCMI_D3: IC1.C3 J1.7 | length 314.8
  Top w3: IC1.C3 222.87,429 438,429 442,433 v1(442,461)
  Bottom w3: J1.7 433.27,452.27 v1(442,461)
DCMI_D4: IC1.D2 J1.31 | length 39.4
  Bottom w3: v1(187.47,385.8) 189.58,387.91 189.58,392.58 194,397 194,418.21 J1.31
DCMI_D5: IC1.D3 J1.29 | length 29.1
  Bottom w3: v1(212.5,393.95) 214.6,396.05 214.6,419.13 J1.29
DCMI_D6: IC1.E2 J1.35 | length 63.8
  Bottom w3: J1.35 157.68,402.79 166.96,393.51 166.96,363.98 v1(168.87,362.07)
DCMI_D7: IC1.E3 J1.28 | length 330.9
  Top w3: v1(195.3,365) 195.3,363.28 206.86,351.72 IC1.E3
  3-SIG w3: v1(195.3,365) 194.32,365.98 186.02,365.98 173.24,378.76 173.24,392.24 186,405 186,439 193.8,446.8 197.49,446.8 203.41,452.73 203.41,476.41 224,497 224,571 237,584 v1(237,606)
  Bottom w3: J1.28 237,579.32 v1(237,606)
DCMI_D8: IC1.F3 J1.26 | length 328.3
  Top w3: v1(192.37,332.92) 192.44,332.92 IC1.F3
  3-SIG w3: v1(192.37,332.92) 210.19,350.73 210.19,372.81 200,383 200,406.18 210.41,416.59 210.41,473.51 232,495.1 232,552.1 256,576.1 v1(256,606)
DCMI_D9: IC1.G2 J1.33 | length 156.3
  Bottom w3: J1.33 174.97,418.87 174.97,377.03 182.8,369.2 182.8,353.8 164,335 164,312 184.58,291.42 184.58,291.11 187.4,288.3 187.4,286.67
  other v1: 185.46,279.64
DCMI_D10: IC1.H3 J1.24 | length 452.2
  Top w3: v1(194.44,262.6) 197.1,262.6 204.19,255.51 IC1.H3
  3-SIG w3: v1(194.44,262.6) 194.44,265.3 199,269.86 199,296 227.52,324.52 230.24,324.52 235.92,330.2 235.92,456.13 ccw(c223.78,459.11) 235.92,462.1 235.92,489.12 239,492.2 239,545 276.2,582.2 v1(276.2,621.27)
  Bottom w4: J1.24 275.79,620.86 v1(276.2,621.27)
DCMI_D11: IC1.H2 J1.22 | length 439.4
  Top w4: IC1.H2 175.49,255.51 v1@191,240
  3-SIG w3: v1(191.83,239.98) 194.81,239.98 198.15,243.33 198.75,243.33 208.54,253.12 208.54,278.51 206,281.05 206,293.1 210.9,298 212.26,298 213.57,299.31 214.93,299.31 242.92,327.3 242.92,330.02 243.42,330.52 243.42,435.92 261.61,454.1 261.61,544.62 301.48,584.49 301.48,603.99 v1(299.97,605.5)
DCMI_D12: IC1.J3 J1.8 | length 630.2
  Top w3: IC1.J3 206.86,223.16 v1(222.3,207.72)
  3-SIG w3: v1(412.23,239.11) 412.18,239.17 412.18,308 417.68,313.5 417.68,326.19 421.07,329.58 421.07,398.93 390,430 390,467 402,479 402,575 v1(433,606)
  4-SIG w3: v1(222.3,207.72) 386.55,207.72 410.13,231.29 410.13,237.01 v1(412.23,239.11)
DCMI_D13: IC1.J2 J1.6 | length 685.7
  Top w3: IC1.J2 175.37,223.09 v1(192.36,206.09)
  3-SIG w3: v1(442.01,271.17) 427.26,285.92 427.26,325.87 428.07,326.68 428.07,401.83 427.26,402.64 427.26,437.74 424.01,440.99 424.01,577.01 v1(453,606)
  4-SIG w3: v1(192.36,206.09) 203.46,195 293.98,195 296.98,198 403,198 433.59,228.59 433.59,262.75 v1(442.01,271.17)
DCMI_FSIN: IC1.K10 J1.23 | length 419.2
  3-SIG w3: v1(434.88,204.7) 457.24,204.7 459,206.46 459,285 v1(443,301)
  4-SIG w3: v1(285,334) 298.29,347.29 314.6,347.29 315.32,348 318.76,348 322.21,348 322.92,347.29 416.21,347.29 428,335.49 428,310 438.76,299.24 441.24,299.24 v1(443,301)
  Bottom w3: J1.23 272.77,418.24 272.77,346.23 v1(285,334)
DCMI_HSYNC: IC1.G3 J1.18 | length 422.3
  Top w4: IC1.G3 207.34,287 v1(222.77,271.57)
  3-SIG w3: v1(222.77,271.57) 222.77,290.52 252.1,319.85 267.48,319.85 269.24,321.61 269.24,540.24 308.6,579.6 325.6,579.6 335,589 v1@335,606.12
  other v1: 334.98,606.15
DCMI_PCLK: IC1.F2 J1.14 | length 560.9
  Top w3: IC1.F2 175.37,318.4 v1(189.52,304.15) v1(189.52,304.15)
  3-SIG w3: v1(374,606) 374,590 393.57,570.43 393.57,486 378,470.43 378,418 393.57,402.43 393.57,349.86 398,345.43 408.57,334.87 v1(408.57,334.76)
  4-SIG w3: v1(189.52,304.15) 190.87,302.81 265.81,302.81 280,317 406.81,317 408.57,318.76 v1(408.57,334.76)
DCMI_PWDN: J1.25 Q1.1 | length 539.3
  3-SIG w3: v1(96.5,404.23) 97.74,402.99 97.74,395.21 103.14,389.81 103.14,361.86 117.11,347.89 117.11,336.54 77,296.44 77,184 v1(114,147)
  4-SIG w3: v1(96.5,404.23) 96.5,386.5 133.43,349.57 225.24,349.57 239,363.32 239,379 v1(256,396)
  Bottom w4: v1(114,147) 121.75,154.75 Q1.1@121.75,164.46
DCMI_PWDN_INT: IC3.3 Q1.3 R4.1 | length 152.3
  Bottom w3: IC3.3 30.6,197.6 35.7,202.7 R4.1 Q1.3@108.8,202.7
DCMI_RST: J1.21 R3.2 | length 851.8
  3-SIG w3: v1(123.68,473.97) 123.68,461.57 111,448.9 84,421.9 84,399.05 96.14,386.91 96.14,357.14 68,329 68,168 118,118 v1(146,118)
  4-SIG w3: v1(123.68,473.97) 125.7,473.97 130.93,468.74 159.32,468.74 170.36,479.78 193.78,479.78 206,492 278.34,492 278.78,491.56 279.14,491.56 282.62,488.08 v1(285.6,488.08) ; v1(146,118) 166,98 240,98 v1(282.53,140.54)
  Bottom w3: v1(285.6,488.08) 288.45,488.08 292.86,483.67 295.33,483.67 298.14,480.86 298.14,423.93 J1.21
DCMI_SCL: IC1.H8 J1.32 | length 678.3
  Top w3: v1(349.86,238.89) 349.86,241.04 IC1.H8
  3-SIG w3: v1(159.42,209.79) 159.79,209.79 172.96,222.96 172.96,340.3 150,363.26 150,377.28 153.71,380.99 153.71,385.71 174.38,406.38 174.38,461.08 200,486.7 200,495 175.89,519.11 175.89,540.49 174.38,542 174.38,550.38 197.18,573.18 v1(197.18,606.9)
  4-SIG w3: v1(159.42,209.79) 169.95,220.32 331.29,220.32 v1(349.86,238.89)
DCMI_SDA: IC1.H9 J1.34 | length 655.7
  Top w4: v1(383.13,243.37) 383.41,243.37 395.55,255.51 IC1.H9
  3-SIG w3: v1(160,238) 160,278.98 162.47,281.45 162.47,309.32 165.14,312 165.14,338.22 143,360.36 143,380.19 146.71,383.91 146.71,393.71 152,399 152.14,399 165.14,412 165.14,461.74 168.89,465.49 168.89,537.59 167.38,539.1 167.38,553.28 168.89,554.79 168.89,567.89 177.14,576.14 v1(177.14,606.72)
  4-SIG w3: v1(160,238) 170.68,227.32 323.32,227.32 337.36,241.36 337.36,244.07 344.69,251.39 355.04,251.39 363.06,243.37 v1(383.13,243.37)
DCMI_VSYNC: IC1.G4 J1.16 | length 430.7
  Top w4: IC1.G4 238.36,286.91 v1(253.24,272.03)
  3-SIG w3: v1(253.24,272.03) 268.21,287 326,287 334,295 334,570 354,590 v1(354,606)
FB: C12.2 IC2.6 R1.1 R2.1 | length 266
  Bottom w6: C12.2 404.7,22.57 R1.1 R2.1 471.3,13 568,13 587.6,32.6 IC2.6
GND: C1.1 C2.1 C3.2 C4.2 C5.2 C6.1 C7.2 C8.1 C9.1 C10.2 C11.2 C13.1 C14.1 C15.1 C16.1 C17.1 C18.2 C19.2 C20.1 C21.2 C22.2 C23.2 C24.2 C25.1 C26.1 C27.1 C28.1 C29.2 C30.1 C31.1 C32.2 C33.1 C34.1 C35.1 C36.1 C37.1 C38.2 C39.1 C40.2 C41.2 C42.1 C43.1 C44.1 C45.1 C46.1 C47.1 C48.1 C49.1 IC1.A2 IC1.B5 IC1.C2 IC1.C8 IC1.C10 IC1.D4 IC1.D5 IC1.D6 IC1.D7 IC1.D8 IC1.D9 IC1.E1 IC1.E4 IC1.E5 IC1.E6 IC1.E7 IC1.E8 IC1.E9 IC1.F4 IC1.F5 IC1.F6 IC1.F7 IC1.F8 IC1.F9 IC1.F11 IC1.G1 IC1.G5 IC1.G6 IC1.G7 IC1.H4 IC1.H5 IC1.H6 IC1.H7 IC1.J1 IC1.J4 IC1.J5 IC1.J6 IC1.J7 IC1.K2 IC1.K3 IC1.K4 IC1.K5 IC1.K6 IC1.K7 IC1.K8 IC1.K9 IC1.L3 IC1.L6 IC1.L9 IC2.2 IC3.2 J1.5 J1.19 J1.27 R2.2 R4.2 | length 2397.6
  Top w3: v1@133.31,300.72 133.31,299.14 143.87,288.58 IC1.G1 ; IC1.J1@143.87,221.14 IC1.J1 ; IC1.K2 191.11,176.78 IC1.K3 IC1.K3@207.15,192.52 ; v1@190.22,171.5 v1(192.24,171.5) ; v1@190.22,175.88 190.22,170.86 194.95,170.86 204.79,161.02 IC1.L3 ; IC1.K4 251.8,179.08 v1(252.79,179.08) ; IC1.H4 238.82,255.51 v1(254.48,239.85) ; IC1.F4 223.49,333.37 223.49,335.22 v1(222.34,336.37) 235.97,350 IC1.E4 ; IC1.D4@238.36,381.29 IC1.D4 240.5,381.49 v1@255.17,366.82 ; v1@252.79,178.09 255.89,181.19 258.51,181.19 IC1.K5 ; v1@254.22,365.66 254.22,365.86 v1@255.17,366.82 ; v1(255.92,366.07) v1@255.17,366.82 ; IC1.J5@269.01,224.01 IC1.J5 ; IC1.G5 285.48,302.63 v1(285.48,302.84) 285.69,302.84 IC1.F6 ; IC1.F5 255,333.35 255,335.15 IC1.E5 ; IC1.D5 v1@255.17,366.82 ; IC1.B5 285.5,460.13 v1(285.5,461.94) ; v1(285.48,271.34) 301.14,287 IC1.G6 ; IC1.J6@300.01,224.01 IC1.J6 ; IC1.K6 301.35,177.37 305.53,173.19 v1(305.53,172.03) ; IC1.H6 IC1.H6@301.35,254.98 ; IC1.D6 301.35,349.65 313.4,337.6 316.66,337.6 v1(318.76,335.5) ; v1(316.98,271.34) 317.19,271.34 IC1.G7 ; v1(316.98,302.84) 317.19,302.84 IC1.F7 ; v1@318.76,336.06 332.7,350 IC1.E7 332.85,349.12 v1(348.63,333.34) 364.34,349.04 IC1.E8 IC1.E9 ; IC1.D7@331.49,381.49 IC1.D7 ; IC1.K7 348,207.67 348,208 348.86,208 IC1.K8 379.82,208 380.36,208 IC1.K9 v1@380.21,176.89 ; IC1.J7 332.32,224.01 v1(316.48,239.85) ; v1(348.48,271.34) 348.48,271.14 IC1.H7 317.19,239.85 v1(316.48,239.85) ; v1(348.48,302.84) 364.14,318.5 IC1.F8 ; v1(379.97,302.84) 395.63,318.5 IC1.F9 ; IC1.F11 460.2,317.13 471.24,317.13 475.92,312.46 v1(478.5,312.46) ; v1(254.48,239.85) 269.85,224.48 IC1.J5 ; v1(254.48,239.85) 269.85,255.22 IC1.H5 285.51,239.85 v1(286.48,239.85) ; IC1.J5 270.64,224.01 v1(286.48,239.85) ; v1(286.48,239.85) 286.48,238.88 IC1.J6 ; v1(286.48,239.85) 301.35,254.72 IC1.H6@301.35,254.98 ; IC1.J6 316.48,239.14 v1(316.48,239.85) ; IC1.H6@301.35,254.98 v1(316.48,239.85)
  Top w4: IC1.C2 159,429.36 159,459.61 IC1.A2 ; IC1.J4 238.64,224.01 v1(254.48,239.85)
  Top w5: IC1.E7 IC1.D7 ; IC1.E8 IC1.D8 IC1.C8
  Top w6: v1(102.13,340.74) 103.66,342.27 108.89,342.27 116.62,350 IC1.E1 ; v2(103.62,247.76) 127.38,224.01 IC1.J1 ; C3.2 C4.2 168.97,533.5 171.97,530.5 172.49,530.5 176,526.99 176,476.61 IC1.A2 ; C1.1 371.13,102 C18.2 398,105 398,158.86 IC1.L9 395.84,161.23 v1(380.18,176.89) ; IC1.E9 IC1.D9 IC1.C10 ; v1(525.58,480.29) 525.58,479.51 533.09,472 538,472 C41.2
  Bottom w3: C16.1 116.84,281 C13.1 ; C35.1 C37.1 ; C21.2 304.25,335.75 318.51,335.75 v1(318.76,335.5) ; J1.19 315.16,440.05 319.17,444.06 319.17,444.17 326,451 326,455.11 329.6,458.7 329.6,469.06 318,480.66 v1(318,493) ; v1(380.18,176.89) v1@382.11,176.89 ; C44.1@394.62,157.62 C44.1 C44.1@398,161.69 ; 421.96,188.75 437.21,188.75 438.97,186.99 438.97,186.31 444.28,181 C45.1 445.66,181 450.97,186.31 450.97,187 459,195.03 C27.1
  Bottom w6: IC3.2 31.02,99.58 61.86,99.58 v2(62.28,99.16) ; v1(44.78,148.03) 45.55,148.8 45.55,156.07 54,164.53 R4.2 ; C31.1 60.89,22.5 72.51,34.12 82.15,34.12 v2(84.06,36.03) 86.35,33.74 94.63,33.74 105.87,22.5 C30.1 ; v1(102.13,340.74) 103.66,342.27 106.77,342.27 118.5,354 C19.2 C24.2 ; C28.1 174.19,190.56 181.87,190.56 183.97,188.46 ; 394,331.81 394,339.8 393.39,340.41 393.39,353.49 C23.2 393.83,355 C38.2 C29.2 ; J1.5 454.74,423.05 454.74,447.72 456.2,449.17 456.2,459.2 462,465 ; C20.1 497.91,282.61 C26.1 540.52,276.88 555.34,276.9 C48.1 ; C40.2 462.73,311.73 477.77,311.73 v1(478.5,312.46) ; R2.2 472.29,52.59 487.01,52.59 496.12,61.69 496.12,62.17 497.5,63.56 IC2.2@497.99,63.56 ; C32.2 506,360 C34.1@507.44,358.56 ; C34.1@503.87,355 C34.1@507.44,358.56 ; v1(506.98,384.45) 508.52,382.92 508.52,364.61 C34.1 C34.1@507.44,358.56 ; C36.1@582.78,173.94 608.07,199.23 624.57,199.23 C14.1
  other v1: 304,31 18,163 18,210 134,297 600.94,324.41 256.71,334.41 35,391 66,405.43 34,483 502,492 182.2,493.09 381,493 444,493 210.76,521.77 291.45,523.47 524.06,522.58 156,524 606,556 34,579 69,617 137,618 246,626
  other v2: 542.4,70.21 206.72,119.95 554.35,197.51 577.28,401.76 469,526 350.86,534.63
RESET_N: IC1.C5 IC2.5 R3.1 | length 696.9
  Top w3: IC1.C5 285.27,397.57 v1(285.27,364.73)
  3-SIG w3: v1(285.27,364.73) 285.27,363.73 301,348 301,324 295,318 279,318 237,276 237,228 289,176 289,159 304.27,143.73 318.77,143.73 v1(319.21,143.29)
  4-SIG w3: v1(319.21,143.29) 319.76,143.29 338.06,125 590.48,125 v1(630.82,84.66)
SPI_MISO: IC1.K11 J1.15 | length 359.3
  3-SIG w3: v1(380,334) 382.98,334 386.61,330.37 ; 386.63,330.37 397,320 397,166 408,155 431,155 458.41,182.41 466.25,182.41 v1(467.46,183.63)
  Bottom w3: J1.15@356.05,419.74 356.05,379.1 363.33,371.81 363.33,350.67 v1(380,334)
SPI_MOSI: J1.17
SPI_SCLK: J1.13
SPI_SSEL: J1.11
SW: IC2.3 L4.2 | length 62.4
  Bottom w8: L4.2 454.75,107.4 IC2.3
VAA: C6.2 C19.1 C29.1 C34.2 C36.2 C38.1 C40.1 IC1.C1 IC1.D10 IC1.E10 IC1.E11 IC1.F10 L6.1 | length 819.2
  Top w3: IC1.F10 428.37,318.5 v1(442.04,332.17) 442.04,333.43 427.33,348.14 IC1.E10 431.04,350 435.65,354.6 435.74,354.6 v1(444.79,363.65) ; IC1.D10 427.33,381.11 v1(444.79,363.65) ; IC1.E11@458.73,349.9 444.98,363.65 v1(444.79,363.65)
  Top w6: L6.1 543.87,285.13 550,279 578.18,279 v2(603.81,253.37)
  Top w8: IC1.E11 478,350 523,305 L6.1
  4-SIG w3: v1(134.56,421.55) 258,421.55 290.55,389 350,389 366,373 366,361 372.71,354.29 419.1,354.29 419.39,354 435.13,354 v1(444.79,363.65)
  Bottom w3: C19.1 119.31,376 114.93,380.39 114.93,381.81 114.48,382.26 114.48,416.82 119.22,421.55 v1(134.56,421.55) ; C6.2 425.97,315.69 431.28,321 431.97,321 442.04,331.07 v1(442.04,332.17) 442.87,333 C40.1 ; C34.2@505.87,333 C34.2
  Bottom w8: C40.1 C34.2@505.87,333
VAA_PIX: C32.1 C46.2 C48.2 IC1.D11 L7.1 | length 127.7
  Top w3: IC1.D11 459.18,381.84 v1@477.47,381.84 ; C46.2@535.7,391.18 C46.2
  Top w6: v1@477.47,381.84 494.37,398.75 523.47,398.75 531.04,391.18 C46.2@535.7,391.18
  Bottom w4: C32.1@466,360 466.43,360.43 466.43,376.98 469.73,380.29 475.56,380.29 v1(477.47,382.2)
  other v4: 538,366
VCC: C14.2 IC2.4 J1.2 J1.10 J1.20 J1.30 J1.36 | length 1191.6
  3-SIG w8: v2(504.12,590.21) 547.79,590.21 609,529 609,371.01 617.56,362.45 617.56,263.66 620.81,260.41 620.81,246.33 617.56,243.07 617.56,125.87 v2(615.96,124.27)
  Bottom w3: v2(615.96,124.27) 615.96,153.25 624.97,162.26 C14.2
  Bottom w6: J1.36 157.68,609.68 174.37,626.37 202.63,626.37 216.73,612.27 J1.30 217.62,577.85 217.62,551.38 220.02,548.98 222,547 310,547 314.33,551.33 314.33,577.91 J1.20 315.16,609.16 333,627 395,627 413.58,608.42 J1.10 415.54,576.78 415.54,552.46 424,544 487,544 492.32,549.32 J1.2
  Bottom w10: J1.20@314.97,571.03 J1.20@315.13,570.87
VDD: C1.2 C2.2 C4.1 C5.1 C11.1 C18.1 C27.2 C28.2 C35.2 C39.2 C41.1 C43.2 C44.2 IC1.A3 IC1.A4 IC1.B1 IC1.B11 IC1.F1 IC1.J11 IC1.K1 IC1.L2 IC1.L5 IC1.L8 IC1.L10 L1.1 | length 2129.2
  Top w3: C11.1 66.69,437 71.5,441.81 71.5,442.14 73.84,444.48 125.19,444.48 127.74,441.93 v1(130.72,441.93) 132,443.2 138.88,443.2 140.15,444.48 IC1.B1 ; v1(191.36,521.47) 191.16,521.67 191.16,534.81 191.36,535 191.36,548.05 193.31,550 225,550 229.37,545.63 229.37,536.6 C5.1
  Top w6: v1(122.04,202.15) 130.11,194.08 142.31,194.08 IC1.K1 ; v1(135.02,332.22) 135.02,330.05 143.87,321.21 IC1.F1 ; L1.1 175.37,95.24 IC1.L2 ; C4.1 190.97,521.76 206.86,505.87 IC1.A3 ; C5.1 230.97,485.35 238.36,477.96 IC1.A4 ; v1(256.78,147.42) 256.78,111.65 261.71,106.72 265.1,106.72 283.43,88.39 C2.2 295.43,97 C1.2 364.34,129.46 IC1.L8 ; v1@256.78,147.95 257.05,147.95 269.85,160.75 IC1.L5 ; C18.1 414,105 414,110.01 413.99,147.69 IC1.L10 ; IC1.J11 458.83,225.23 v1(472.71,239.11) ; IC1.B11 494.61,444.48 v2(511.64,461.51) 526.15,447 C41.1
  3-SIG w5: v1(122.04,202.15) 120.31,203.87 120.31,208.37 119.2,209.48 119.2,320.4 129.3,330.5 130.87,330.5 132.51,332.15 v1@132.51,332.22 ; v1(135.02,332.22) 133.53,333.71 133.02,334.22 127,340.24 125.11,342.14 125.11,351.21 111.14,365.18 111.14,393.13 111,393.26 111,422.21 132.44,443.65 137.22,443.65 143,449.43 143,475.58 140.93,477.65 140.93,488.83 143,490.9 143,517.91 142.5,518.41 142.5,529.59 143,530.09 143,597 175,629 207,629 220,616 220,581 188.92,549.92 188.92,528.9 189.63,528.19 189.63,523.19 v1(191.36,521.47)
  3-SIG w6: v1(472.71,239.11) 488.99,239.11 492.5,242.63 492.5,442.37 v2(511.64,461.51)
  4-SIG w6: v1(122.04,202.15) 121.65,201.76 121.65,166.69 135.34,153 149.54,153 v1(167.45,170.91) 184.29,154.08 249.27,154.08 255.92,147.42 v1(256.78,147.42) ; v1(353.24,169.6) 360.99,161.85 383.95,161.85 385.61,163.51 413.87,163.51 v1(422.57,172.21) 473.03,222.67 473.03,238.79 v1(472.71,239.11)
  Bottom w6: v1(122.04,202.15) 131.23,192.96 C28.2 ; v1@166.69,171.68 v1(167.45,170.91) ; v1(256.78,147.42) 265.48,156.12 265.48,162.09 268.48,165.09 C39.2 ; C27.2 460.5,226 463.5,229 463.5,229.91 v1(472.71,239.11)
VDD_IO_PHY: C23.1 C25.2 C26.2 IC1.C9 L5.1 | length 503
  Top w3: v1(378.5,366.97) 380.2,368.67 380.2,397.35 IC1.C9
  3-SIG w6: v2(523.24,427.64) 524.99,425.9 524.99,379 507,361.01 507,255.46 v2(524.99,237.47)
  4-SIG w6: v1(378.5,366.97) 378.43,367.04 378.43,388.43 408.39,418.39 490.18,418.39 499.68,427.9 522.99,427.9 v2(523.24,427.64)
  Bottom w3: v1(378.5,366.97) 380.6,369.07 383.59,369.07 390.52,376 C23.1@394.01,376
  Bottom w6: L5.1 484.9,167.06 C26.2@484.9,199.03
VDD_PHY: C8.2 C9.2 C22.1 IC1.C7 L2.1 | length 377.6
  Top w3: IC1.C7 349,396.84 349,366.33 v1(350.4,364.93)
  Top w6: L2.1 326.87,570 C8.2 386.38,575.13 C9.2
  3-SIG w6: v1(350.4,364.93) 350.4,389.66 364,403.26 364,515.07 v2(378.64,529.71)
  Bottom w3: v1@347.43,364.93 v1(350.4,364.93)
VDD_REG: C12.1 C15.2 L1.2 L2.2 L3.2 L4.1 R1.2 | length 1085.9
  Top w6: v2(115,589) 213.84,589 L2.2
  3-SIG w6: v2(80.96,381.05) 80.96,380.45 55,354.49 55,162.65 v2(145.92,71.73)
  4-SIG w6: v2(80.96,381.05) 80.96,467.34 85,471.37 85,559 v2(115,589)
  Bottom w6: v2(145.92,71.73) 173.65,44 282.11,44 C15.2@316.39,78.29 ; C15.2@322.41,68.08 339.49,51 R1.2 367.3,22.57 C12.1 ; C15.2@325.8,77.84 366.21,77.84 385.65,97.28 L4.1 L4.1@367.3,86.65
VDD_SLVS: C16.2 C17.2 C21.1 IC1.C6 L3.1 | length 502.1
  Top w3: IC1.C6 317,397.34 317,369.27 v1(318.25,368.02)
  4-SIG w3: v1(58.05,377.34) 58.05,339.95 80.84,317.16 231.16,317.16 241,327 241,338 254.13,351.13 289.35,351.13 292.5,354.29 297.33,354.29 300.04,357 307.22,357 v1(318.25,368.02)
  Bottom w3: C21.1@299.93,358 C21.1 305.5,358 315.53,368.02 v1(318.25,368.02)
  Bottom w6: L3.1 54.62,358.22 C17.2@54.62,327.7 ; C17.2 63.63,317.13 C16.2
VDDA: C31.2 IC3.1 J1.4 Q1.2 | length 1591.6
  3-SIG w8: v2@33.24,39.3 33.24,19.69 37.93,15 600,15 610,25 610,90 634,114 634,591 601.22,623.78 482.32,623.78 481.08,622.55 474.55,622.55 v2(472.63,620.64)
  Bottom w3: IC3.1 31.19,75 68,75 81.43,88.43 81.43,139.43 94.04,152.04 94.04,167.26
  Bottom w6: C31.2 25.34,69.53 30.22,74.41 IC3.1
  Bottom w8: J1.4 v2(472.63,620.64)
  other v2: 33.62,39.68
VDDIO: C3.1 C7.1 C10.1 C13.2 C20.2 C24.1 C33.2 C37.2 C42.2 C45.2 C47.2 C49.2 IC1.A1 IC1.A5 IC1.A11 IC1.D1 IC1.H1 IC1.H11 IC1.L1 IC1.L4 IC1.L7 IC1.L11 L8.1 | length 1700.6
  Top w6: C3.1 129.74,534.26 129.74,523.26 143.87,509.13 IC1.A1 ; IC1.A5 270.97,477.1 270.97,506.05 ; C7.1@270.97,535 270.97,506.05 ; v1(283.79,506) 283.74,506.05 270.97,506.05 ; v1(446.09,241.26) 446.09,242.14 458.83,254.87 IC1.H11 492,255.51 ; v1(452.33,150.41) 462.13,140.62 L8.1 491,72 C49.2 ; IC1.L11 482.02,161.02 492,171 492,255.51 ; IC1.A11 504.97,522.12 C10.1@504.97,534 ; C47.2@554,255.13 553.62,255.51 492,255.51
  3-SIG w6: v1@133.43,388.3 135.74,390.61 135.74,396.94 154.64,415.83 154.64,483.03 v1(154.43,483.24) ; v1(134.21,389.08) 134.21,357.13 153.97,337.37 153.97,284.97 132.7,263.7 v1(132.7,247) 132.7,211.29 148.55,195.44 v1(148.55,172.41) 149.88,171.08 149.88,163.12 160,153 212.32,153 v1(231.23,171.91)
  4-SIG w3: v1(154.43,483.24) 177.19,506 v1(283.79,506) 456.86,506 462.13,500.72 v1(462.13,488.14)
  4-SIG w6: v1(231.23,171.91) 231.92,171.91 238.74,165.08 276.08,165.08 300.49,189.49 310.53,189.49 328.01,172.02 328.01,158.18 350.19,136 385.12,136 385.61,135.51 397.21,135.51 397.7,136 404,136 418.41,150.41 v1(452.33,150.41)
  Bottom w6: v1(132.7,247) 143.6,257.9 153.87,257.9 C13.2 ; v1(134.21,389.08) 135.74,387.55 135.74,383.26 138.5,380.5 138.5,379 141.5,376 C24.1 ; v1(446.09,241.26) 456.13,251.3 456.13,257.61 459.13,260.61 C20.2
  other v1: 327.24,172.78
VDDIO_REG: C30.2 IC2.1 IC3.5 L5.2 L6.2 L7.2 L8.2 | length 1066.3
  Top w6: v2(123.02,60.09) 136.11,47 363,47 388,72 L8.2 427.87,53.13 449.11,31.89 531.23,31.89 539.09,39.75 v2(540.74,39.75) ; L7.2 579.89,345.23 579.89,324.87 578.77,323.75 578.77,305.65 L6.2
  3-SIG w6: v2(540.74,39.75) 543.04,42.04 551.15,42.04 579.42,70.32 v1(579.42,324.39)
  Bottom w6: IC3.5 118.14,74.41 123.02,69.53 v2(123.02,60.09) 123.66,60.09 142.09,41.65 C30.2 ; L5.2 519.68,152.41 519.68,148.32 572.25,95.75 572.25,44.17 559.96,31.89 550.26,31.89 542.4,39.75 v2(540.74,39.75)
pads on no net: FD1.1 FD2.1 FD3.1 FD4.1 FD5.1 FD6.1 FD7.1 FD8.1 H1.P$1 H1.P$2 IC1.A6 IC1.A7 IC1.A8 IC1.A9 IC1.A10 IC1.B6 IC1.B7 IC1.B8 IC1.B9 IC1.B10 IC1.C11 IC1.G8 IC1.G9 IC1.G10 IC1.G11 IC1.H10 IC1.J8 IC1.J9 IC1.J10 IC3.4 J1.0 J1.MH1 J1.MH2
copper on no net:
  other v2: 68,477 582,477 69,520 581,520
  other v3: -275.03,325 924.97,325

## Polygon pours and split planes (outlines as drawn)
GND on Bottom "GND_L06_P002" (solid, remove dead copper, pour order 2): -366,650 -366,0 1025,0 1025,650
GND on 5-GND "GND_L05_P003" (solid, remove dead copper, pour order 3): -366,650 -366,0 1025,0 1025,650
GND on 2-GND "GND_L02_P004" (solid, remove dead copper, pour order 4): -366,650 -366,0 1025,0 1025,650

## Keep-outs
Keep-Out Layer:
  the board outline again, w5

## Other copper
Bottom:
  region: 594.47,534.82 537.66,534.82 537.66,463.77 594.47,463.77
  rectangle: 55.53,463.77 112.34,534.82

## Silkscreen, mask and mechanical layers (free items; w line width, h text height)
Bottom Overlay:
  text "AR0231 R1" at 593.34,385 h30 r270
  text "openmv.io" at 10.01,377 h30 r270
Dimension:
  lines w3.94: 1091.57,-15.67 1190.61,-15.67 1382,-15.67 1523.29,-15.67 ; 1091.57,31.74 1190.61,31.74 1382,31.74 1523.29,31.74 ; 1091.57,79.15 1190.61,79.15 1382,79.15 1523.29,79.15 ; 1091.57,126.55 1190.61,126.55 1382,126.55 1523.29,126.55 ; 1091.57,173.96 1190.61,173.96 1382,173.96 1523.29,173.96 ; 1091.57,221.37 1190.61,221.37 1382,221.37 1523.29,221.37 ; 1091.57,268.78 1190.61,268.78 1382,268.78 1523.29,268.78 ; 1091.57,316.18 1190.61,316.18 1382,316.18 1523.29,316.18 ; 1091.57,363.59 1190.61,363.59 1382,363.59 1523.29,363.59 ; 1091.57,411 1190.61,411 1382,411 1523.29,411 ; 1091.57,458.41 1190.61,458.41 1382,458.41 1523.29,458.41 ; 1091.57,505.82 1190.61,505.82 1382,505.82 1523.29,505.82 ; 1091.57,553.22 1190.61,553.22 1382,553.22 1523.29,553.22 ; 1091.57,600.63 1190.61,600.63 1382,600.63 1523.29,600.63 ; 1091.57,648.04 1523.29,648.04 ; 1190.61,695.45 1190.61,-63.08 ; 1382,695.45 1382,-63.08 ; 1190.61,-63.08 1091.57,-63.08 1091.57,695.45 1523.29,695.45 1523.29,-63.08 1382,-63.08 ; 1190.61,-63.08 1382,-63.08
  text "OpenMV FHD-HDR-AR0231" at 61.58,732.2 h80
  text "Layer" at 1115.27,659.89 h23.7
  text "Name" at 1214.31,659.89 h23.7
  text "Thickness" at 1405.7,659.89 h23.7
  text "Top Overlay" at 1214.31,612.48 h23.7
  text "Top Solder" at 1214.31,565.08 h23.7
  text "0.010mm" at 1405.7,565.08 h23.7
  text "1" at 1115.27,517.67 h23.7
  text "Top" at 1214.31,517.67 h23.7
  text "0.035mm" at 1405.7,517.67 h23.7
  text "Dielectric 2" at 1214.31,470.26 h23.7
  text "0.127mm" at 1405.7,470.26 h23.7
  text "2" at 1115.24,422.85 h23.7
  text "2-GND" at 1214.29,422.85 h23.7
  text "0.035mm" at 1405.7,422.85 h23.7
  text "Dielectric 3" at 1214.31,375.44 h23.7
  text "0.254mm" at 1405.7,375.44 h23.7
  text "3" at 1115.27,328.04 h23.7
  text "3-SIG" at 1214.31,328.04 h23.7
  text "0.035mm" at 1405.7,328.04 h23.7
  text "Dielectric 1" at 1214.31,280.63 h23.7
  text "0.200mm" at 1405.7,280.63 h23.7
  text "4" at 1115.27,233.22 h23.7
  text "4-SIG" at 1214.31,233.22 h23.7
  text "0.035mm" at 1405.7,233.22 h23.7
  text "Dielectric 4" at 1214.31,185.81 h23.7
  text "0.254mm" at 1405.7,185.81 h23.7
  text "5" at 1115.27,138.41 h23.7
  text "5-GND" at 1214.31,138.41 h23.7
  text "0.035mm" at 1405.7,138.41 h23.7
  text "Dielectric 9" at 1214.31,91 h23.7
  text "0.127mm" at 1405.7,91 h23.7
  text "6" at 1115.27,43.59 h23.7
  text "Bottom" at 1214.31,43.59 h23.7
  text "0.035mm" at 1405.7,43.59 h23.7
  text "TG-170 or equivalent substrate  / Er = 4.3-4.5 @ 1MHz / +/- 10% /  / double side solder mask red / double side silkscreen white /  / 3 mil min trace width and / 3 mil min isolation /  / RoHS required" at 1666,13.11 h30
  text "Bottom Solder" at 1214.31,-3.82 h23.7
  text "0.010mm" at 1405.7,-3.82 h23.7
  text "Bottom Overlay" at 1214.31,-51.23 h23.7
tPlace:
  circle w10: c-275.03,325 r90.14
  circle w10: c924.97,325 r90.14
bPlace:
  text "AR0231 R1" at 610.28,415.44 h27.2 r270
  text "openmv.io" at 34.34,410.91 h27.2 r270